# EAGLE board underground_cable_fault_finder (EAGLE 6.1)

Size 160 x 100 mm. Coordinates in mm from the lower left corner, seen from the top.
Outline: 0,0 160,0 160,100 0,100 0,0
Copper layers (1*16): Top 0.035mm / dielectric 1.5mm / Bottom 0.035mm
Design rules: minimum track width 10mil, minimum drill 24mil, track to track 8mil, track to pad 8mil, pad to pad 8mil, via to via 8mil, smd to smd 8mil, copper to edge 40mil, drill to drill 8mil, minimum pad ring 10mil, minimum via ring 8mil, stop-mask expansion 4mil, vias tented up to drill 0mil, thermal gap 10mil

## Footprints (pad centres in the part's own frame; a part is rotated, then mirrored left to right if it is on the bottom)
05P = drill 0.914 long: 1 -5.08,0; 2 -2.54,0; 3 0,0; 4 2.54,0; 5 5.08,0
TO39/4 = drill 0.813 octagon: 1 -2.54,-2.54; 2 2.54,-2.54; 3 2.54,3.81; 4 -2.54,3.81
C025-024X044 = drill 0.813 octagon: 1 -1.27,0; 2 1.27,0
C5B7.2 = drill 0.813 pad 1.6 octagon: 1 -2.54,0; 2 2.54,0
C2.5-3 = drill 0.813 pad 1.6 octagon: 1 -1.27,0; 2 1.27,0
C2.5-6 = drill 0.813 pad 1.6 octagon: 1 -1.27,0; 2 1.27,0
03P = drill 0.914 long: 1 -2.54,0; 2 0,0; 3 2.54,0
16P = drill 0.914 long: 1 -19.05,0; 2 -16.51,0; 3 -13.97,0; 4 -11.43,0; 5 -8.89,0; 6 -6.35,0; 7 -3.81,0; 8 -1.27,0; 9 1.27,0; 10 3.81,0; 11 6.35,0; 12 8.89,0; 13 11.43,0; 14 13.97,0; 15 16.51,0; 16 19.05,0
04P = drill 0.914 long: 1 -3.81,0; 2 -1.27,0; 3 1.27,0; 4 3.81,0
QS = drill 0.61 long: 1 -2.54,0; 2 2.54,0
DO41-10 = drill 1.118: A 5.08,0; C -5.08,0
DIL40 = drill 0.813 long: 1 -24.13,-7.62; 2 -21.59,-7.62; 3 -19.05,-7.62; 4 -16.51,-7.62; 5 -13.97,-7.62; 6 -11.43,-7.62; 7 -8.89,-7.62; 8 -6.35,-7.62; 9 -3.81,-7.62; 10 -1.27,-7.62; 11 1.27,-7.62; 12 3.81,-7.62; 13 6.35,-7.62; 14 8.89,-7.62; 15 11.43,-7.62; 16 13.97,-7.62; 17 16.51,-7.62; 18 19.05,-7.62; 19 21.59,-7.62; 20 24.13,-7.62; 21 24.13,7.62; 22 21.59,7.62; 23 19.05,7.62; 24 16.51,7.62; 25 13.97,7.62; 26 11.43,7.62; 27 8.89,7.62; 28 6.35,7.62; 29 3.81,7.62; 30 1.27,7.62; 31 -1.27,7.62; 32 -3.81,7.62; 33 -6.35,7.62; 34 -8.89,7.62; 35 -11.43,7.62; 36 -13.97,7.62; 37 -16.51,7.62; 38 -19.05,7.62; 39 -21.59,7.62; 40 -24.13,7.62
TO220V = drill 1.016 long: 1 -2.54,-2.54; 2 0,-2.54; 3 2.54,-2.54
DIL20 = drill 0.813 long: 1 -11.43,-3.81; 2 -8.89,-3.81; 3 -6.35,-3.81; 4 -3.81,-3.81; 5 -1.27,-3.81; 6 1.27,-3.81; 7 3.81,-3.81; 8 6.35,-3.81; 9 8.89,-3.81; 10 11.43,-3.81; 11 11.43,3.81; 12 8.89,3.81; 13 6.35,3.81; 14 3.81,3.81; 15 1.27,3.81; 16 -1.27,3.81; 17 -3.81,3.81; 18 -6.35,3.81; 19 -8.89,3.81; 20 -11.43,3.81
SPC4077 = drill 0.8 pad 2.184 long: 1 -3,0; 2 0,-4.8 | drill 1 pad 2.184 long: 3 3,0
JP1 = drill 0.914 long: 1 0,-2.54; 2 0,2.54
LED5MM = drill 0.813 octagon: A -1.27,0; K 1.27,0
0204/7 = drill 0.813 octagon: 1 -3.81,0; 2 3.81,0
G5LE = drill 1.321 long: 1 -7.493,-5.969; 2 -7.493,5.969; O 4.699,5.969; P -9.525,0; S 4.699,-5.969
09P = drill 0.914 long: 1 -10.16,0; 2 -7.62,0; 3 -5.08,0; 4 -2.54,0; 5 0,0; 6 2.54,0; 7 5.08,0; 8 7.62,0; 9 10.16,0
DA-03 = drill 0.813 octagon: 1 -2.54,-5.08; 2 0,-5.08; 3 2.54,-5.08; 4 2.54,1.27; 5 0,1.27; 6 -2.54,1.27
DP-02 = drill 0.813 long: 1 -2.54,-2.54; 2 2.54,-2.54; 3 2.54,3.81; 4 -2.54,3.81
255SB = drill 1.118 long: 1 -2.54,0; 2 0,0; 3 2.54,0
02P = drill 0.914 long: 1 -1.27,0; 2 1.27,0
TO92 = drill 0.813 octagon: 1 2.54,-1.27; 2 0,1.905; 3 -2.54,-1.27
RTRIM64P = drill 0.61: 1 -2.54,-3.81; 2 7.62,0; 3 -2.54,2.54

## Placement (x,y rotation side)
AVRCONNECTOR  [05P]  -92.71,82.55 0 top  (outside the outline)
BRIDGE  [TO39/4]  -81.28,41.91 0 top  (outside the outline)
C1  33pf  [C025-024X044]  -78.74,100.33 0 top  (outside the outline)
C2  33pf  [C025-024X044]  -83.82,100.33 0 top  (outside the outline)
C3  470uf  [C5B7.2]  -33.02,54.61 0 top  (outside the outline)
C4  .01uf  [C2.5-3]  -73.66,83.82 0 top  (outside the outline)
C5  4.7uf  [C2.5-3]  -80.01,83.82 0 top  (outside the outline)
C6  0.1uf  [C2.5-6]  -92.71,100.33 0 top  (outside the outline)
C7  150pf  [C2.5-3]  -67.31,83.82 0 top  (outside the outline)
CONN-6  3 pin  [03P]  -55.88,66.04 0 top  (outside the outline)
CONN-7  3 pin  [03P]  -64.77,66.04 0 top  (outside the outline)
CONNECTOR  LCD  [16P]  -69.85,55.88 0 top  (outside the outline)
CONNECTOR-5  4 pin  [04P]  -45.72,66.04 0 top  (outside the outline)
CRYSTAL  11.0592 mhz  [QS]  -83.82,66.04 0 top  (outside the outline)
D1  1N4007  [DO41-10]  -80.01,92.71 0 top  (outside the outline)
D2  1N4007  [DO41-10]  -92.71,92.71 0 top  (outside the outline)
D3  1N4007  [DO41-10]  -19.05,100.33 0 top  (outside the outline)
IC1  AT89S51  [DIL40]  -39.37,10.16 0 top  (outside the outline)
IC2  7805TV  [TO220V]  -43.18,59.69 0 top  (outside the outline)
IC3  adc804  [DIL20]  -26.67,44.45 0 top  (outside the outline)
J1  [SPC4077]  -77.47,26.67 0 top  (outside the outline)
JP1  TRANSFORMER  [JP1]  -69.85,24.13 0 top  (outside the outline)
LED2  5mm  [LED5MM]  -34.29,100.33 0 top  (outside the outline)
LED3  5MM  [LED5MM]  -46.99,100.33 0 top  (outside the outline)
LED4  5MM  [LED5MM]  -59.69,100.33 0 top  (outside the outline)
LED5  5MM  [LED5MM]  -72.39,100.33 0 top  (outside the outline)
R1  10k  [0204/7]  -100.33,97.79 0 top  (outside the outline)
R2  560E  [0204/7]  -17.78,105.41 0 top  (outside the outline)
R3  10k  [0204/7]  -27.94,105.41 0 top  (outside the outline)
R4  10k  [0204/7]  -38.1,105.41 0 top  (outside the outline)
R5  10k  [0204/7]  -48.26,105.41 0 top  (outside the outline)
R6  10k  [0204/7]  -58.42,105.41 0 top  (outside the outline)
R7  10k  [0204/7]  -68.58,105.41 0 top  (outside the outline)
R8  10k  [0204/7]  -78.74,105.41 0 top  (outside the outline)
R9  10k  [0204/7]  -88.9,105.41 0 top  (outside the outline)
R10  10k  [0204/7]  -99.06,105.41 0 top  (outside the outline)
R11  10k  [0204/7]  -17.78,109.22 0 top  (outside the outline)
R12  10k  [0204/7]  -27.94,109.22 0 top  (outside the outline)
R13  10k  [0204/7]  -38.1,109.22 0 top  (outside the outline)
R14  10k  [0204/7]  -48.26,109.22 0 top  (outside the outline)
R15  10k  [0204/7]  -58.42,109.22 0 top  (outside the outline)
R16  1K  [0204/7]  -68.58,109.22 0 top  (outside the outline)
R17  1K  [0204/7]  -78.74,109.22 0 top  (outside the outline)
R18  5.6K  [0204/7]  -88.9,109.22 0 top  (outside the outline)
R19  5.6K  [0204/7]  -99.06,109.22 0 top  (outside the outline)
R20  5.6K  [0204/7]  -17.78,113.03 0 top  (outside the outline)
R21  1K  [0204/7]  -27.94,113.03 0 top  (outside the outline)
RELAY-1  12V  [G5LE]  -82.55,8.89 0 top  (outside the outline)
RELAY-2  12V  [G5LE]  -26.67,29.21 0 top  (outside the outline)
RELAY-3  12V  [G5LE]  -53.34,29.21 0 top  (outside the outline)
RN10  10 k  [09P]  -24.13,66.04 0 top  (outside the outline)
S1  ON/ OFF SWITCH  [DA-03]  -54.61,46.99 0 top  (outside the outline)
S2  push switch  [DP-02]  -69.85,43.18 0 top  (outside the outline)
S3  [255SB]  -96.52,64.77 0 top  (outside the outline)
S4  [255SB]  -19.05,74.93 0 top  (outside the outline)
S5  [255SB]  -31.75,74.93 0 top  (outside the outline)
S6  [255SB]  -44.45,74.93 0 top  (outside the outline)
S7  [255SB]  -57.15,74.93 0 top  (outside the outline)
S8  [255SB]  -69.85,74.93 0 top  (outside the outline)
S9  [255SB]  -82.55,74.93 0 top  (outside the outline)
S10  [255SB]  -95.25,74.93 0 top  (outside the outline)
S11  [255SB]  -19.05,83.82 0 top  (outside the outline)
S12  [255SB]  -31.75,83.82 0 top  (outside the outline)
S13  [255SB]  -44.45,83.82 0 top  (outside the outline)
S14  [255SB]  -57.15,83.82 0 top  (outside the outline)
SL2  [02P]  -29.21,91.44 0 top  (outside the outline)
SL3  LM35  [03P]  -73.66,66.04 0 top  (outside the outline)
SL8  [05P]  -19.05,91.44 0 top  (outside the outline)
T1  BC547  [TO92]  -41.91,92.71 0 top  (outside the outline)
T2  BC547  [TO92]  -55.88,92.71 0 top  (outside the outline)
T3  BC547  [TO92]  -69.85,92.71 0 top  (outside the outline)
VR  10k  [RTRIM64P]  -96.52,43.18 0 top  (outside the outline)
VR1  10k  [RTRIM64P]  -21.59,55.88 0 top  (outside the outline)

## Library data of the parts
AVRCONNECTOR CONN-6 CONN-7 CONNECTOR CONNECTOR-5 RN10 SL2 SL3 SL8 = con-amp-quick; OC_FARNELL: unknown; OC_NEWARK: unknown
BRIDGE IC2 = linear
C1 C2 R16-R21 = rcl
C3-C7 = capacitor-wima
CRYSTAL = special
D1-D3 = diode
IC1 = atmel; OC_FARNELL: unknown; OC_NEWARK: unknown
IC3 = atmel; MPN: ATF16V8CZ-15PU; OC_FARNELL: 1551768; OC_NEWARK: 94M6254
J1 = con-jack; OC_FARNELL: unknown; OC_NEWARK: unknown
JP1 = jumper
LED2-LED5 = led
R1-R15 = eagle-ltspice; SPICEMODEL: NONE; SPICEPREFIX: R
RELAY-1-RELAY-3 = relay; OC_FARNELL: unknown; OC_NEWARK: unknown
S1 = switch-dil; MPN: MCDA03; OC_FARNELL: 1521999; OC_NEWARK: 74M2972
S2 = switch-dil; MPN: MCDP02; OC_FARNELL: 1255233; OC_NEWARK: 26M1095
S3-S14 = switch
T1-T3 = transistor
VR VR1 = resistor

## Nets
N$1: C2.1 CRYSTAL.1 IC1.18
N$2: C1.1 CRYSTAL.2 IC1.19
N$3: BRIDGE.1 C1.2 C2.2 C3.1 C4.2 C5.2 C7.2 CONNECTOR-5.1 CONNECTOR-5.2 CONNECTOR.1 CONNECTOR.5 CONNECTOR.16 IC1.20 IC2.2 IC3.1 IC3.2 IC3.7 IC3.8 IC3.10 LED2.K R1.2 RELAY-1.S RELAY-2.S RELAY-3.S S5.1 S10.1 S14.1 SL2.2 SL3.3 SL8.1 T1.1 T2.1 T3.1 VR1.3 VR.3
N$4: C3.2 C4.1 CONN-6.1 CONN-6.2 CONN-6.3 CONNECTOR-5.3 D1.C D2.C D3.C IC2.1 R2.2 R16.2 R17.2 R21.1 RELAY-1.1 RELAY-2.1 RELAY-3.1 S1.5
N$5: BRIDGE.2 J1.3 JP1.2
N$6: IC1.1 IC3.18
N$7: IC1.2 IC3.17
N$8: IC1.3 IC3.16
N$9: IC1.4 IC3.15
N$10: IC1.5 IC3.14
N$11: AVRCONNECTOR.5 IC1.6 IC3.13
N$12: AVRCONNECTOR.1 IC1.7 IC3.12
N$13: IC3.11
N$14: AVRCONNECTOR.3 C6.1 IC1.9 R1.1 S2.1
N$15: C5.1 C6.2 CONN-7.1 CONN-7.2 CONN-7.3 CONNECTOR-5.4 CONNECTOR.2 CONNECTOR.15 IC1.31 IC1.40 IC2.3 IC3.20 RN10.1 S2.2 SL2.1 SL3.1 SL8.2 SL8.3 SL8.4 SL8.5 VR1.1 VR.1
N$16: BRIDGE.4 J1.1 J1.2 JP1.1
N$17: IC3.19 R3.2
N$18: C7.1 IC3.4 R3.1
N$19: IC3.6 SL3.2
N$20: S3.3 S4.3 S5.3 S6.3 S7.3 S8.3 S9.3 S10.3 S11.3 S12.3 S13.3 S14.3
N$21: R4.2 S8.2
N$22: R5.2 S3.2
N$23: IC3.9 VR1.2
N$24: IC1.37 RN10.4
N$25: IC1.36 R18.2 RN10.5
N$27: IC1.34 RN10.7
N$28: IC1.33 RN10.8
N$29: IC1.32 RN10.9
N$30: CONNECTOR.7 IC1.21
N$31: CONNECTOR.8 IC1.22
N$32: CONNECTOR.9 IC1.23
N$33: R5.1 S8.1
N$34: R6.2 S4.2
N$35: CONNECTOR.12 IC1.26
N$36: R6.1 S3.1
N$37: R7.2 S5.2
N$38: CONNECTOR.3 VR.2
N$40: R9.1 S9.1
N$41: R8.2 S9.2
N$42: R9.2 S6.2
N$43: LED2.A R2.1
N$44: R10.1 S6.1
N$45: AVRCONNECTOR.2 IC1.8
N$47: BRIDGE.3 S1.6
N$48: CONNECTOR.6 IC1.38 RN10.3
N$49: S7.2
N$50: R11.1 S7.1
N$51: CONNECTOR.10 IC1.24
N$52: CONNECTOR.11 IC1.25
N$53: S10.2
N$54: CONNECTOR.13 IC1.27
N$55: CONNECTOR.14 IC1.28
N$57: R12.2 S11.2
N$58: CONNECTOR.4 IC1.39 RN10.2
N$59: R13.2 S12.2
N$60: R14.2 S13.2
N$61: S14.2
N$62: R13.1 S11.1
N$63: R14.1 S12.1
N$64: R15.1 S13.1
N$65: D1.A LED3.K RELAY-1.2 T2.3
N$67: R19.1 T1.2
N$68: R18.1 T2.2
N$69: LED3.A R17.1
N$70: LED4.A R16.1
N$72: R8.1 RELAY-1.P
N$73: R12.1 RELAY-2.P
N$74: R20.2
N$75: D2.A LED4.K RELAY-2.2 T1.3
N$77: D3.A LED5.K RELAY-3.2 T3.3
N$78: R20.1 T3.2
N$79: LED5.A R21.2
N$80: R4.1 RELAY-3.P
N$83: IC1.35 R19.2 RN10.6
N$84: R7.1 S4.1

## Tracks (layer width: path | path; a pad name or v marks a point on that pad's centre or on a via)
N$1  (2 unrouted)
N$2  (2 unrouted)
N$3  (34 unrouted)
N$4  (17 unrouted)
N$5  (2 unrouted)
N$6  (1 unrouted)
N$7  (1 unrouted)
N$8  (1 unrouted)
N$9  (1 unrouted)
N$10  (1 unrouted)
N$11  (2 unrouted)
N$12  (2 unrouted)
N$14  (4 unrouted)
N$15  (21 unrouted)
N$16  (3 unrouted)
N$17  (1 unrouted)
N$18  (2 unrouted)
N$19  (1 unrouted)
N$20  (11 unrouted)
N$21  (1 unrouted)
N$22  (1 unrouted)
N$23  (1 unrouted)
N$24  (1 unrouted)
N$25  (2 unrouted)
N$27  (1 unrouted)
N$28  (1 unrouted)
N$29  (1 unrouted)
N$30  (1 unrouted)
N$31  (1 unrouted)
N$32  (1 unrouted)
N$33  (1 unrouted)
N$34  (1 unrouted)
N$35  (1 unrouted)
N$36  (1 unrouted)
N$37  (1 unrouted)
N$38  (1 unrouted)
N$40  (1 unrouted)
N$41  (1 unrouted)
N$42  (1 unrouted)
N$43  (1 unrouted)
N$44  (1 unrouted)
N$45  (1 unrouted)
N$47  (1 unrouted)
N$48  (2 unrouted)
N$50  (1 unrouted)
N$51  (1 unrouted)
N$52  (1 unrouted)
N$54  (1 unrouted)
N$55  (1 unrouted)
N$57  (1 unrouted)
N$58  (2 unrouted)
N$59  (1 unrouted)
N$60  (1 unrouted)
N$62  (1 unrouted)
N$63  (1 unrouted)
N$64  (1 unrouted)
N$65  (3 unrouted)
N$67  (1 unrouted)
N$68  (1 unrouted)
N$69  (1 unrouted)
N$70  (1 unrouted)
N$72  (1 unrouted)
N$73  (1 unrouted)
N$75  (3 unrouted)
N$77  (3 unrouted)
N$78  (1 unrouted)
N$79  (1 unrouted)
N$80  (1 unrouted)
N$83  (2 unrouted)
N$84  (1 unrouted)